# Altium PCB MiniRelay_revA.PcbDoc
Units mil, origin at the board's own origin, x right, y up, seen from the top; angles counter-clockwise.
Board outline 354.33 x 1929.13 mil, 2 copper layers (Top Layer, Bottom Layer), stack 61.756 mil thick; 12 components, 7 nets, 25 pads, 5 vias.
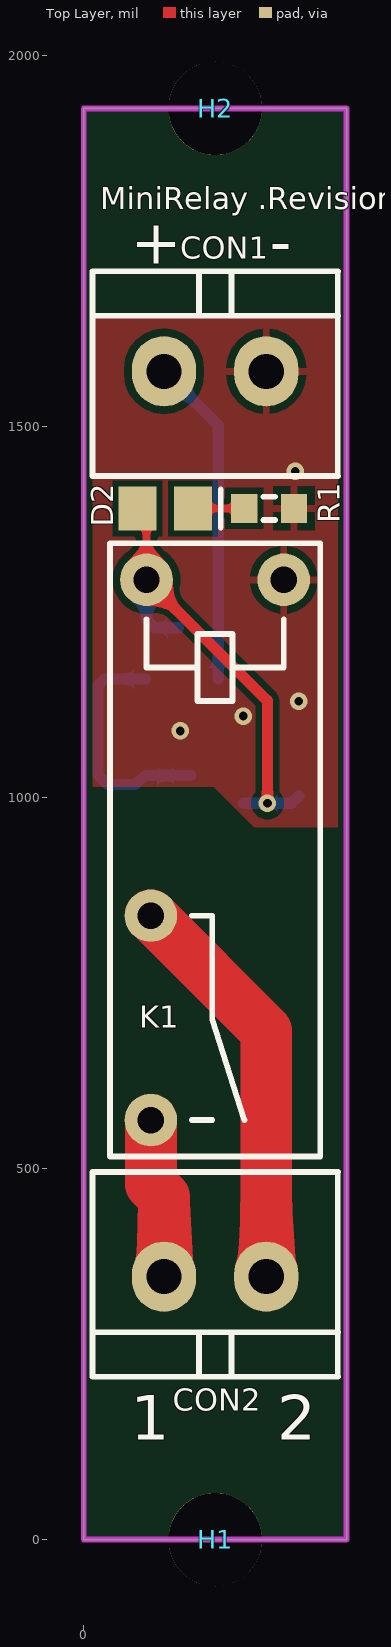
[diagram p0: Top Layer view]
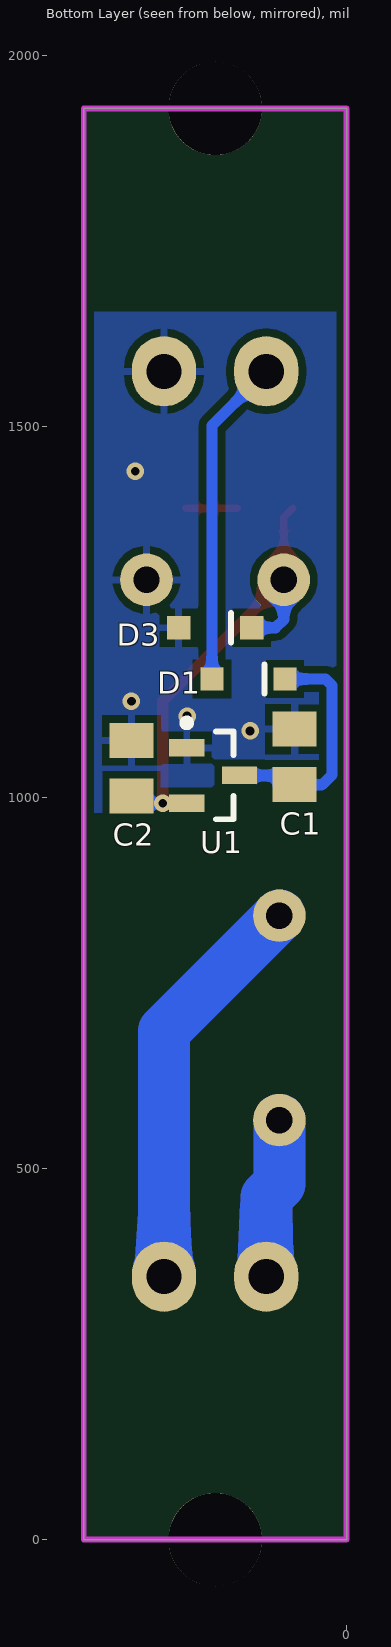
[diagram p1: Bottom Layer view, seen from below]
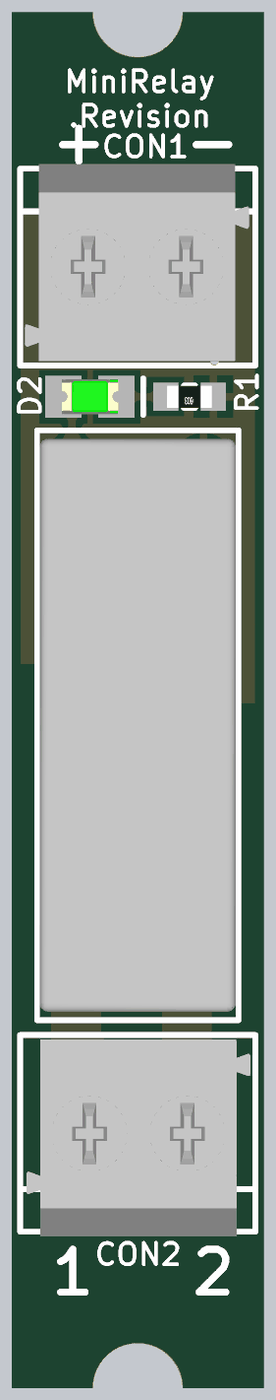
[diagram p2: 3D render of the assembled board from above, using the file's embedded part models]
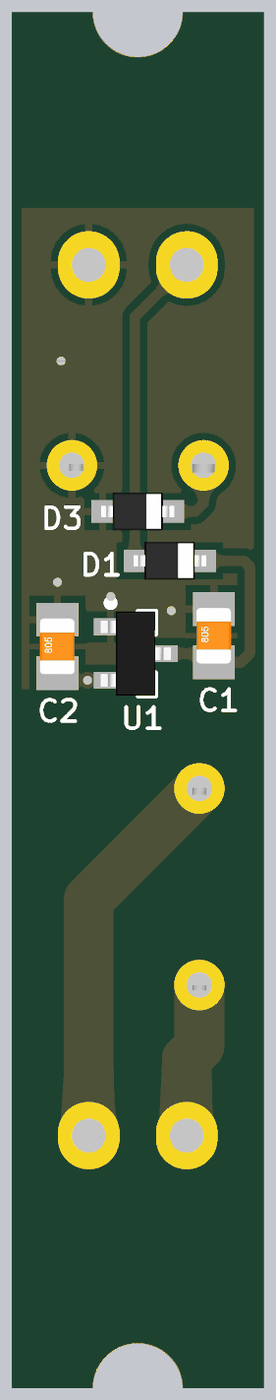
[diagram p3: 3D render of the assembled board from below, using the file's embedded part models]

## Layer stack, top to bottom
Top Solder: solder mask 1, SM-001, Dk 4
Top Layer: signal copper 1.378
Dielectric 1: core 59, Core-043, Dk 4.3
Bottom Layer: signal copper 1.378
Bottom Solder: solder mask 1, SM-001, Dk 4

## Board outline
0,0 0,1929.13 354.33,1929.13 354.33,0

## Design rules (kind name [scope] priority, off if disabled: settings)
Clearance poly_clerance [InNamedPolygon('GND_BOT') or InNamedPolygon('GND_BOT')] p1: gap=10 ignorepadtopadclearanceinfootprint=FALSE
Clearance [All] p2: gap=10 ignorepadtopadclearanceinfootprint=TRUE except(8: Arc-Arc Arc-Track Arc-SMDPad Arc-Fill Arc-Poly Arc-Region Track-Track Track-SMDPad Track-Fill Track-Poly Track-Region SMDPad-SMDPad SMDPad-Fill SMDPad-Poly SMDPad-Region Fill-Fill Fill-Poly Fill-Region Poly-Poly Poly-Region Region-Region)
DiffPairsRouting [All] p1: maxlimit=100 minlimit=9 mostfreqgap=10 toplayer_minwidth=7 toplayer_maxwidth=20 toplayer_prefwidth=15 bottomlayer_minwidth=7 bottomlayer_maxwidth=20 bottomlayer_prefwidth=15 maxuncoupledlength=500
FanoutControl Fanout_LCC [IsLCC] p1: bgadir=Out bgaviamode=Centered fanoutstyle=Auto fanoutdirection=Alternating viagrid=1 // Fanout_LCC (Default Rule)
FanoutControl Fanout_SOIC [IsSOIC] p2: bgadir=Out bgaviamode=Centered fanoutstyle=Auto fanoutdirection=Alternating viagrid=1 // Fanout_SOIC (Default Rule)
FanoutControl Fanout_Small [(CompPinCount < 5)] p3: bgadir=Out bgaviamode=Centered fanoutstyle=Auto fanoutdirection=OutThenIn viagrid=1 // Fanout_Small (Default Rule)
FanoutControl Fanout_Default [All] p4: bgadir=Out bgaviamode=Centered fanoutstyle=Auto fanoutdirection=Alternating viagrid=1 // Fanout_Default (Default Rule)
Height [All] p1: minheight=0 maxheight=1200 prefheight=500
HoleSize [All] p1: absolutevalues=TRUE maxlimit=200 minlimit=1 maxpercent=80.000 minpercent=20.000
HoleToHoleClearance [All] p1: gap=5 allowstackedmicrovias=TRUE
MinimumSolderMaskSliver [All] p1: minsoldermaskwidth=1
PasteMaskExpansion [InNet('230V_N')] p1: expansion=20
PlaneClearance [All] p1: clearance=10
PlaneConnect Via_Thermal_Relief [IsStitchingVia Or IsVia] p1: planeconnectstyle=Direct reliefexpansion=20 reliefentries=4 reliefconductorwidth=10 reliefairgap=40
PlaneConnect PEConnect [InNet('PE')] p2: planeconnectstyle=Relief reliefexpansion=20 reliefentries=4 reliefconductorwidth=10 reliefairgap=40
PlaneConnect [All] p3: planeconnectstyle=Direct reliefexpansion=8 reliefentries=4 reliefconductorwidth=8 reliefairgap=5
PolygonConnect GND_VIA_CONN [InNet('GND') And (IsStitchingVia Or IsVia)] p1: connectstyle=Direct reliefconductorwidth=10 reliefentries=4 polygonreliefangle="90 Angle" airgapwidth=10
PolygonConnect GNDE_VIA_CONN [InNet('GNDE') And (IsStitchingVia Or IsVia)] p2: connectstyle=Direct reliefconductorwidth=10 reliefentries=4 polygonreliefangle="90 Angle" airgapwidth=10
PolygonConnect BAT-VIA_CONN [InNet('BAT-') And (IsStitchingVia Or IsVia)] p3: connectstyle=Direct reliefconductorwidth=10 reliefentries=4 polygonreliefangle="90 Angle" airgapwidth=10
PolygonConnect [All] p4: connectstyle=Relief reliefconductorwidth=10 reliefentries=4 polygonreliefangle="90 Angle" airgapwidth=10
RoutingVias [All] p1: holewidth=5.91 width=11.81 viastyle="Through Hole" minholewidth=5.91 minwidth=11.81 maxholewidth=500 maxwidth=1000
SilkToSilkClearance [All] p1: silktosilkclearance=5
SilkToSolderMaskClearance SilkscreenOverComponentPads [IsPad] p1: minsilkscreentomaskgap=1 clearancetoexposedcopper=TRUE
SolderMaskExpansion [InNet('230V_N')] p1: expansion=5 istentingtop=FALSE
Width GND [InNet('GND')] p1: maxlimit=100 minlimit=7 preferedwidth=50
Width [All] p2: maxlimit=200 minlimit=7 preferedwidth=8
15 further rules are at their usual default settings.

## Components (designator, comment, footprint, x,y, rotation, side; value= is the part's Value field where it differs from the comment)
C1 "1uF" CAP0805 70,1055 r90 bottom
C2 "1uF" CAP0805 290,1040 r90 bottom
CON1 "1776275-2" Terminal-block-2way-3.5 177.17,1574.8 r180 top
CON2 "1776275-2" Terminal-block-2way-3.5 177.17,354.33 r0 top
D1 "BAS140WE6327" SOD323 132.17,1160 r0 bottom
D2 "KP-2012LSGC" 0805_LED_GRN 110,1390 r0 top
D3 "BAS140WE6327" SOD323 177.17,1229.15 r0 bottom
H1 "3.2/6mm" Hole-3.2/0 177.17,0 r0 top
H2 "3.2/6mm" Hole-3.2/0 177.17,1929.13 r0 top
K1 "PCJ-105D3M.301" 1721081-2 177.17,929.57 r270 top
R1 "1k" RES0603 250,1390 r180 top
U1 "MCP1799T-3302H/TT" SOT23-3L 180,1030 r180 bottom

## Footprints (in the part's own frame and the unit in brackets; to place one, negate y for a bottom-side part, rotate by r counter-clockwise, add the part's x,y. Pads: shape width x height; smd on the part's side, far side on the other; paste and mask are expansions set on the pad)
0805_LED_GRN [mm] "Chip Diode; Body 2.0 x 1.3 mm (LxW typ)"
  rect 1.3x1.5 smd: 1(0.95,0) 2(-0.95,0)
  silkscreen extent 1.9,-0.65 1.9,0.65, body extent -1.01,-0.63 1.01,0.62, height 1.1
1721081-2 [mm] "Miniature PCB Relay PCJ"
  round 1.8 hole 0.9: 11(2.25,-2.2) 14(9.25,-2.2) A1(-9.25,2.35) A2(-9.25,-2.35)
  silkscreen extent -10.5,-3.6 10.5,3.6, body extent -10.2,-3.5 10.2,3.5, height 15
CAP0805 [mm] "Chip Capacitor, Body 2.0x1.3mm, IPC Medium Density"
  rect 1.2x1.5 smd: 1(-0.95,0) 2(0.95,0)
  body extent -1,-0.62 1,0.63, height 0.78
Hole-3.2/0 [mm] "3.2mm dia hole with no ring/ metalization"
  round 3.2 hole 3.2: 1(0,0)
RES0603 [mm] "Chip Resistor, Body 1.6x0.8mm, IPC Medium Density (0603)"
  rect 0.9x1 smd: 1(-0.85,0) 2(0.85,0)
  silkscreen extent -0.2,-0.4 0.2,0.4, body extent -0.8,-0.4 0.8,0.4, height 0.3
SOD323 [mm] "SOD323"
  rect 0.8x0.8 smd: 1(-1.25,0) 2(1.25,0)
  silkscreen extent -0.55,-0.5 -0.55,0.5, body extent -1.3,-0.67 1.3,0.68, height 1.1
SOT23-3L [mm] "SOT23, 3-Leads, Body 2.9x1.3mm, Pitch 0.95mm, Lead Span 2.5mm, IPC High Density"
  rect 1.2x0.6 smd: 1(-0.9,0.95) 2(-0.9,-0.95) 3(0.9,0)
  silkscreen extent -1.02,-1.5 0.7,1.92, body extent -1.25,-1.5 1.25,1.5, height 1.05
Terminal-block-2way-3.5 [mm] "PCB terminal block; angled 90°; 3.5mm; ways: 2; on PCBs; terminal"
  oval 2.2x2.4 hole 1.2: 1(-1.75,0) 2(1.75,0)
  silkscreen extent -4.2,-3.43 4.2,3.58, body extent -3.97,-3.58 4.03,3.42, height 8.4

## Part data
C1 C2: library part Capacitor, "Capacitor", Dielectric=X5R, Tolerance=20%, Voltage=50V, Type=Ceramic
CON1 CON2: library part "Terminal Block 2", "Screwed terminal block with 2 pins", Manufacturer="TE Connectivity", Identifier=1776275-2
D1 D3: library part BAS140W, "Silicon Schottky Diode. General-purpose diode for high-speed switching", Manufacturer=Infineon, I_F=120mA, Identifier=BAS140WE6327, V_F=1V, V_R=40V
D2: "LED; SMD; 0805; green; 0.2÷0.5mcd; 2x1.25x1.1mm; 160°; 1.9÷2.25V", Color=Green, Forward current=2mA, Forward voltage=1.9...2.25V, Manufacturer="KINGBRIGHT ELECTRONIC", Identifier=KP-2012LSGC
H1 H2: library part hole_metalized, "Generic hole component with 1 electrical connection", size=3.2/6mm
K1: library part PCJ-1xxD3M.301, "Miniature PCB Relay PCJ", Manufacturer="TE Connectivity", Identifier=PCJ-105D3M.301
R1: library part Resistor, "Generic resistor symbol", Power=63mW, Tolerance=1%
U1: library part MCP1799T-xx02H/TT, "IC: voltage regulator; LDO,linear,fixed; 3.3V/5V; 80mA; SOT23; SMD", CurrentMaxOut=80mA, Manufacturer=Microchip, VoltageMaxInput=45V, VoltageMaxOutput=3.3/5V, VoltageMinInput=4.5/6.2V, Identifier=MCP1799T-3302H/TT, VoltageMinOutput=3.3/5V

## Via types
v1: diameter 23.62, hole 11.81, Top Layer to Bottom Layer, tented both sides, 5 vias

## Nets (pads, with @x,y where several pads share a name; then routed paths per layer and width w, separated by ;. In a path a pad name is that pad's centre, name@x,y a point inside that pad or via, vN(x,y) a via of type N, cw(c..) or ccw(c..) an arc to the next point about the centre after c; other vN are vias at no path point)
3V3: C2.1 D2.2 D3.1 K1.A2 U1.2 | length 650
  Top Layer w10: D2.2 84.65,1377.95 K1.A2
  Top Layer w15: K1.A2 247.72,1130.67 v1(247.72,992.6)
  Bottom Layer w15: K1.A2 84.65,1240.35 95.85,1229.15 D3.1 ; U1.2 v1(247.72,992.6) 280,992.6 C2.1
GND: C1.2 C2.2 CON1.1 D3.2 K1.A1 R1.1 U1.1
  other v1: 130,1090 215,1110 290,1130 285,1440
NetD2_1: D2.1 R1.2 | length 69.1
  Top Layer w10: D2.1 R1.2
P1_1: CON2.2 K1.11 | length 1102.1
  Top Layer w70: K1.11 246.06,685.47 CON2.2
  Bottom Layer w70: K1.11 246.06,685.47 CON2.2
P2_1: CON2.1 K1.14 | length 436.8
  Top Layer w70: K1.14 90.55,479.45 108.27,461.73 CON2.1
  Bottom Layer w70: K1.14 90.55,479.45 108.27,461.73 CON2.1
VIN: CON1.2 D1.2 | length 445.1
  Bottom Layer w15: CON1.2 181.38,1501.69 D1.2
VIN2_1: C1.1 D1.1 U1.3 | length 323.4
  Bottom Layer w15: D1.1 28.22,1160 19.44,1151.21 19.44,1030.56 32.4,1017.6 C1.1 82.4,1030 U1.3
pads on no net: H1.1 H2.1

## Polygon pours and split planes (outlines as drawn)
GND on Bottom Layer "GND_BOT" (solid, remove dead copper, pour order 1): 0,1655 0,980 355,980 355,1655
GND on Top Layer "GND_TOP" (solid, remove dead copper, pour order 2): 0,1650 355,1650 355,960 230,960 175,1015 0,1015

## Keep-outs
Keep-Out Layer:
  the board outline again, w7.87

## Silkscreen, mask and mechanical layers (free items; w line width, h text height)
Top Overlay:
  text "MiniRelay .Revision" at 22.5,1793.01 h30
  text "+" at 63.27,1719.81 h60
  text "-" at 251.07,1719.81 h60
  text "1" at 63.27,134.34 h60
  text "2" at 261.07,134.34 h60

## Dimensions
0,1929.13 to 0,0 on Mechanical 1
0,1929.13 to 354.33,1929.13 on Mechanical 1